# Altium PCB BLDC-2020.PcbDoc (part 3 of 3)
Units mil, origin at the board's own origin, x right, y up, seen from the top; angles counter-clockwise.
Board outline 3000 x 7500 mil, 4 copper layers (Top Layer, GND, Power, Bottom Layer), stack 26.468 mil thick; 202 components, 138 nets, 710 pads, 30 vias.
Unrouted connection lines stored in the file: 399.
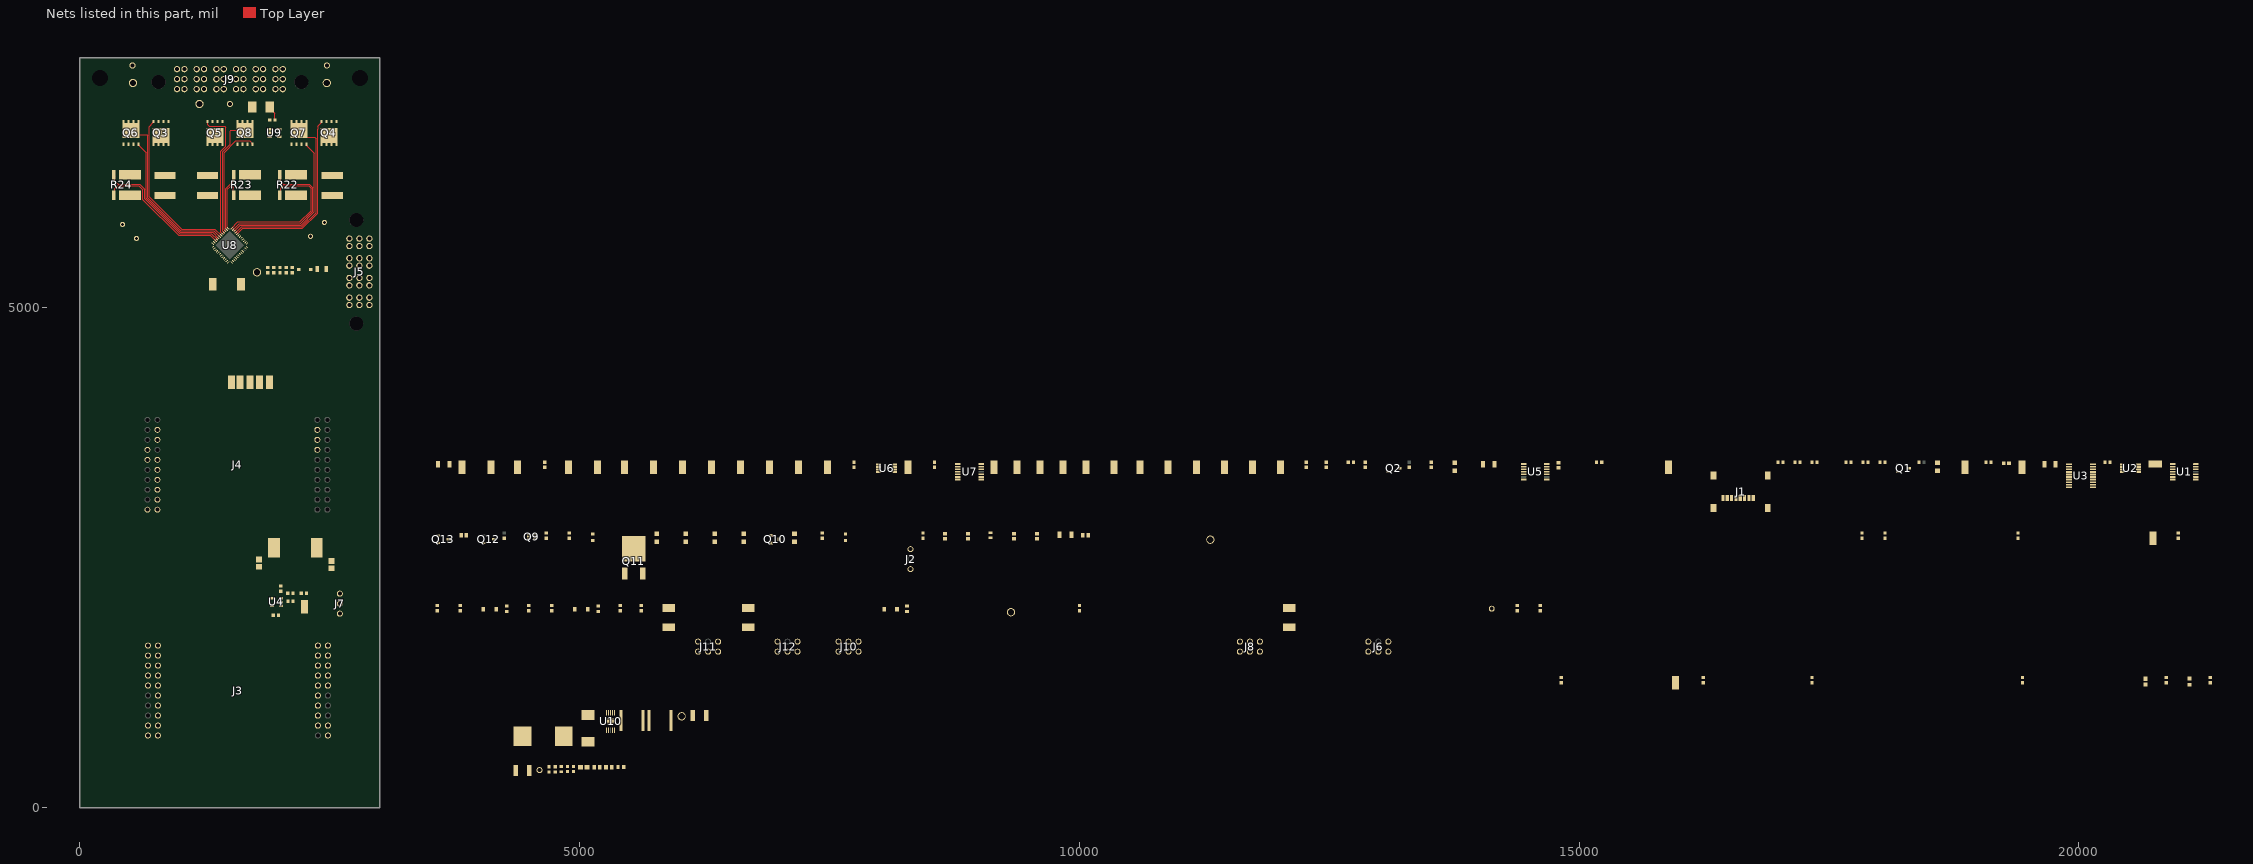
[diagram p3: the nets of this part, all layers, seen from the top]

## Part data (continued)
U2 U6: library part CMP-0859-00525-4, "TRIPLE SCHMITT-TRIGGER BUFFER, DCT0008A, LARGE T&R", F @ Nom Voltage(Max)(Mhz)=150, Generic Part Number=SN74LVC3G17, ICC @ Nom Voltage(Max)(mA)=0.01, Manufacturer="Texas Instruments", Operating Temperature Range(C)="-40 to 125,-40 to 85", Rating=Catalog, tpd @ Nom Voltage(Max)(ns)=9.2,6.2,5.4,4.1, Voltage(Nom)(V)=1.8,2.5,3.3,5, 3-State Output=No, Bits(#)=3, DatasheetVersion=SCES470E, Input Type=CMOS/TTL, Logic=True, Output Drive (IOL/IOH)(Max)(mA)=32/-32, Output Type=CMOS, PackageReference=DCT0008A, Schmitt Trigger=Yes, Sub-Family="Non-Inverting Buffer/Driver", Technology Family=LVC, VCC(Max)(V)=5.5, VCC(Min)(V)=1.65
U3: library part CMP-2000-04956-1, "Bidirectional Voltage-Level Translator for Open-Drain and Push-Pull Application, 8 bit, 1.2 to 3.6 V, -40 to 85 degC, 20-Pin TSSOP, Green (RoHS & no Sb/Br), Tape and Reel", Logic Case Style=TSSOP, Manufacturer="Texas Instruments", Operating Temperature Max=85degC, Operating Temperature Min=-40degC, Output Current=620µA, Supply Voltage Max=5.5V, Supply Voltage Min=1.2V, Datasheet URL=https://datasheet.ciiva.com/14287/txs0108e-14287280.pdf, Datasheet Version="Rev. B, 09/2008", Logic Type=VoltageLevelTranslator, Manufacturer URL=http://www.ti.com/, MSL=MSL1-Unlimited, No. of Inputs=8, No. of Pins=20, Packaging=CutTape, Propagation Delay=4.8ns, SVHC=NoSVHC(16-Jun-2014)
U4: library part CMP-0359-01946-2, "Single Channel, Low Noise, CMOS Operational Amplifier, RRO, 18 MHz Typical GBW, 10 V/us Typical SR, 2.8 to 6 V, 5-Pin SOT23 (S5-5), Commercial, Pb-Free, Mini Reel", Linear Technology Part Number=LTC6240, Manufacturer="Linear Technology", PartNumber=LTC6240CS5#TRMPBF, Channels (#)=1, Code_JEDEC=MO-193, ComponentLink1Description="Manufacturer URL", ComponentLink1URL=http://www.linear.com/, ComponentLink2Description=Datasheet, ComponentLink2URL=http://cds.linear.com/docs/en/datasheet/624012fe.pdf, ComponentLink3Description="Package Specification", ComponentLink3URL=http://cds.linear.com/docs/en/packaging/SOT_5_05-08-1635.pdf, DatasheetVersion="Rev. E", GBW (MHz) Typical=18, Is (mA) Typical=2, Mounting Technology="Surface Mount", PackageDescription="5-Lead Plastic TSOT-23, Body 1.63 x 2.90 mm, Pitch 0.95 mm", PackageReference=LT-S5-5-TSOT-23, Packing="Mini Reel", RevisionNote="URLs updated", RoHS=Pb-Free, SR (V/us) Typical=10, Type=VFB, Vos (mV) Typical=0.04, Vs Max (V)=6, Vs Min (V)=2.8
U5: library part CMP-2000-07335-1, "4-Bit Bidirectional Voltage-Level Translator with Automatic Direction Sensing and +/- 15-kV ESD Protection, -40 to 85 degC, 14-Pin TSSOP (PW), Green (RoHS & Sb/Br), Tape and Reel", Manufacturer="Texas Instruments", Operating Temperature=-40°C~85°C, Package / Case="14-TSSOP(0.173\",4.40mmWidth)", Package Description="14-Pin Thin Shrink Small Outline Package, Body 5 x 4.4 mm, Pitch 0.65 mm", Package Reference=PW14, Standard Package=1, Supplier Device Package=14-TSSOP, Voltage - Supply=1.2V~3.6V,1.65V~5.5V, Category=IntegratedCircuits(ICs), Data Rate=100Mbps, Datasheet URL=http://www.ti.com/general/docs/lit/getliterature.tsp?genericPartNumber=TXB0104&fileType=pdf, Datasheet Version="Rev. G, 11/2014", Differential - Input=Output:No/No, Dynamic Catalog=TXBSeries, Family=Logic-Translators, Input Type=Logic, Logic Function=Translator,Bidirectional, Manufacturer URL=http://www.ti.com/, Mounting Technology=SurfaceMount, Number of Bits=4, Number of Channels=4, Number of Outputs/Channel=1, Other Names=296-21929-6, Output Type=Logic, Packaging=Digi-Reel®, Product Training Modules=VoltageLevelTranslation, Propagation Delay (Max)=4ns, Series=-
U8: "IC 3PHASE GATE DRIVER 48VQFN", Manufacturer="Texas Instruments", Max Operating Temperature=125°C, Min Operating Temperature=-40°C, ClassName="3.3V Regulator", ComponentLink1Description=http://www.ti.com/lit/ds/symlink/drv8323r.pdf?src-supplier=Digi-Key, ComponentLink1URL=http://www.ti.com/lit/ds/symlink/drv8323r.pdf?src-supplier=Digi-Key, Manufacturer 2="Texas Instruments", Manufacturer Part Number=DRV8323RSRGZR, Manufacturer Part Number 2=DRV8323RSRGZR, Pricing 1="1=4.44, 10=3.991, 100=3.2698, 500=2.78356, 1000=2.34758 (USD)", Pricing 2="1=4.44000, 10=3.99100, 100=3.26980, 500=2.78356, 1000=2.34758 (USD)", RoHS=No, Stock 1=5951, Stock 2=7391, Supplier 1=Digi-Key, Supplier 2=Digi-Key
U9: library part CMP-0192-00172-1, "Thermal Sensor with SPI Interface, 5-Pin SOT-23, -55°C to +125°C Temperature, Tape and Reel", Code_IPC=SOT23-5, DatasheetVersion="revA, Aug-2002", PackageDescription="5-Lead Plastic Small Outline Transistor (CT) [SOT-23]", PackageReference=SOT-23-CT5, PackageVersion="revBB, Aug-2009"
U10: library part CMP-0323-00512-3, "Buck Inverting Buck-Boost Step Down Regulator with 3.5 to 60 V Input and 0.8 to 58 V Output, -40 to 150 degC, 10-Pin MSOP-PowerPAD (DGQ), Green (RoHS & no Sb/Br)", Manufacturer="Texas Instruments", Rating=Catalog, Switch Current Limit(Typ)(A)=3.5, ClassName="5V Regulator", Code_JEDEC=MO-187-BA-T, ComponentLink1Description=Datasheet, ComponentLink1URL=http://www.ti.com/general/docs/lit/getliterature.tsp?genericPartNumber=TPS54260&fileType=pdf, ComponentLink2Description="Package Specification", ComponentLink2URL=http://www.ti.com/lit/ml/mpds043e/mpds043e.pdf, ComponentLink3Description="URL Link1", ComponentLink3URL="Samples URL:http://www.ti.com/product/tps54260#samples", DatasheetVersion=SLVSA86A, Duty Cycle(Max)(%)=98, Eco-Plan="Green (RoHS & no Sb/Br)", Iout(Max)(A)=2.5, Iq(Typ)(mA)=0.138, Mounting Technology="Surface Mount", PackageDescription="10-Pin PowerPAD Plastic Small Outline 0.5 mm Pitch, Exposed Pad", PackageReference=DGQ0010D, PackageVersion="revF, Nov-2011", PartNumber=TPS54260DGQR, Regulated Outputs(#)=1, SubFamily="Step-Down Regulator", Topology="Buck, Inverting Buck-Boost", Vin(Max)(V)=60, Vin(Min)(V)=3.5, Vout(Max)(V)=58, Vout(Min)(V)=0.8

## Free pads (board coordinates)
  round 150 hole 160: 5(200,7300) 5(2800,7300)

## Via types
v1: diameter 19.68, hole 7.87, Top Layer to Bottom Layer, 30 vias

## Nets (pads, with @x,y where several pads share a name; then routed paths per layer and width w, separated by ;. In a path a pad name is that pad's centre, name@x,y a point inside that pad or via, vN(x,y) a via of type N, cw(c..) or ccw(c..) an arc to the next point about the centre after c; other vN are vias at no path point)
3.3V: C1.2 C3.2 C5.1 C6.2 C10.2 C12.2 C22.2 C26.2 C36.2 J1.4 J3.1 L2.2 L3.1 Q9.3 Q13.G R5.2 R6.2 R7.2 R19.2 R20.2 R21.2 R30.2 R35.1 R47.2 R48.2 TP46.1 U1.13 U1.14 U3.2 U4.5 U5.1 U7.13 U7.14 U9.5
5V: C2.2 C4.2 C9.2 C11.2 C27.2 C28.2 F1.2 F2.2 F3.2 F4.2 J6.1 J10.1 L1.2 R2.2 R10.2 R14.2 R15.2 R16.2 R27.2 R29.2 R36.2 R37.2 R39.2 R40.2 TP45.1 U2.8 U3.19 U5.14 U6.8
+3.3V: C21.2 U8.26
AGND: C3.1 C4.1 C5.2 C7.1 C9.1 C10.1 C15.1 C16.1 C17.1 C18.1 C19.1 C20.1 C21.1 C22.1 C25.1 C26.1 C27.1 C28.1 C29.1 C30.1 C31.1 C32.1 C33.1 C34.2 C35.2 C36.1 C37.1 C38.1 C39.1 C40.1 D2.2 D3.1 D4.2 D5.2 D6.2 J5.P3-1 J5.P3-2 J5.P3-3 J5.P3-4 J5.P3-5 J5.P3-6 J5.P4-1 J5.P4-2 J5.P4-3 J5.P4-4 J5.P4-5 J5.P4-6 J6.3 J7.3 J8.3 J10.3 J11.3 J12.3 LED6.1 LED7.1 Q1.S Q2.S Q9.1 Q10.3 Q11.3 Q12.S Q13.S R1.1 R4.1 R12.1 R18.1 R22.3 R23.3 R24.3 R25.2 R26.1 R31.1 R32.1 R34.1 R42.1 R46.2 R49.1 R51.1 R53.1 R55.1 TP42.1 TP43.1 TP44.1 TP47.1 TP48.1 TP50.1 U3.11 U4.2 U5.5 U5.7 U5.10 U8.2 U8.27 U8.35 U8.43 U9.2 U10.9 U10.11
  other v1: 5284.57,844.11 5331.82,844.11 5308.2,861.83 5284.57,879.54 5331.82,879.54
CAL: J3.2 R26.2 R43.1 U8.34
Chan_A: J4.39 TP2.1 U1.6
Chan_A_Raw: J10.5 U2.3
Chan_B: J4.38 TP3.1 U1.8
Chan_B_Raw: J10.6 U2.6
CS_DRV: J3.8 R19.1 U8.32
CS_SD: J1.2 J3.11 R5.1 R44.2
CS_TEMP: J3.32 R20.1 U9.1
Enable: R18.2 R45.1 TP31.1 U8.33
EXT_SPI_CLK: J8.4 U5.13
EXT_SPI_MISO: J8.6 U5.11
EXT_SPI_MOSI: J8.5 U5.12
"Fan Enable": J3.31 Q11.1 R42.2
GHA: Q4.G TP32.1 U8.8 | length 1822.9
  Top Layer w10: U8.8@1573.08,5739.84 1628.24,5795 2225.51,5795 2378.34,5947.83 2378.34,6787.07 2378.34,6816 2405.84,6843.49 2415,6852.66 Q4.G@2415,6864.17
GHB: Q5.G TP33.1 U8.17 | length 1319.5
  Top Layer w10: Q5.G@1275,6864.17 1277.56,6861.62 1277.56,6832.44 1295,6815 1450,6815 1460,6805 1460,6615.25 1410,6565.25 1410,5756.76 U8.17@1426.92,5739.84
GHC: Q3.G TP34.1 U8.18 | length 1649.3
  Top Layer w10: Q3.G@735,6864.17 735,6855 694,6814 694,6109.88 1015.88,5788 1350.92,5788 U8.18@1413,5725.92
GLA: Q7.G TP38.1 U8.10 | length 1589.1
  Top Layer w10: U8.10@1545.24,5767.67 1604.56,5827 2212.25,5827 2345.69,5960.43 2345.69,6548.25 2265,6628.94 Q7.G@2265,6635.83
GLB: Q8.G TP39.1 U8.15 | length 1139
  Top Layer w10: U8.15@1454.76,5767.67 1455,5767.91 1443,5779.91 1443,6553 1560,6670 1697.72,6670 1725,6642.72 Q8.G@1725,6635.83
GLC: Q6.G TP40.1 U8.20 | length 1459.3
  Top Layer w10: Q6.G@585,6635.83 585,6630 662,6553 662,6096.63 1002.63,5756 1327.24,5756 U8.20@1385.16,5698.08
GND: C1.1 C2.1 C6.1 C11.1 C12.1 J1.6 J1.Shield J3.20 J3.22 J4.20 R17.1 U1.7 U1.12 U2.4 U6.4 U7.7 U7.12
"Hall A": J3.19 TP18.1 U7.3
"Hall B": J3.13 TP19.1 U7.6
"Hall C": J3.12 TP29.1 U7.8
Hall_A_Raw: J6.4 R14.1 U6.1
Hall_B_Raw: J6.5 R15.1 U6.3
Hall_C_Raw: J6.6 R16.1 U6.6
"Hi A": J3.40 TP9.1 U8.37
"Hi B": J3.38 TP11.1 U8.39
"Hi C": J3.36 TP13.1 U8.41
Index: J4.40 TP1.1 U1.3
Index_Raw: J10.4 U2.1
IO_1: J11.4 U3.20
IO_1_RAW: J3.26 U3.1
IO_2: J11.5 U3.18
IO_2_RAW: J3.27 U3.3
IO_3: J11.6 U3.17
IO_3_RAW: J3.28 U3.4
IO_4: J12.4 U3.16
IO_4_RAW: J3.29 U3.5
IO_5: J12.5 U3.15
IO_5_RAW: J3.30 U3.6
IO_6: J12.6 U3.14
IO_6_RAW: J4.37 U3.7
IO_7: J10.2 U3.13
IO_7_RAW: J4.36 U3.8
IO_8: J8.2 U3.12
IO_8_RAW: J4.35 U3.9
"Low A": J3.39 TP10.1 U8.38
"Low B": J3.37 TP12.1 U8.40
"Low C": J3.35 TP14.1 U8.42
NetC7_2: C7.2 R9.2 U4.3
NetC8_1: C8.1 R8.2 R9.1
NetC13_2: C13.2 U8.5
NetC14_1: C14.1 U8.3
NetC14_2: C14.2 U8.4
NetC20_2: C20.2 U8.36
NetC23_1: C23.1 D2.1 L2.1 U8.45
NetC23_2: C23.2 U8.44
NetC24_1: C24.1 U10.1
NetC24_2: C24.2 D3.2 L1.1 U10.10
NetC31_2: C31.2 U10.4
NetC32_2: C32.2 R33.2
NetC33_2: C33.2 R33.1 U10.8
NetC37_2: C37.2 J7.1 L3.2
NetD1_2: D1.2 R25.1 | length 151.4
  Top Layer w10: D1.2@1899.02,7010 1899.02,6998.5 1950,6947.52 1950,6880.59 R25.1@1950.59,6880
NetF1_1: F1.1 J2.1
NetF2_1: F2.1 J8.1
NetF3_1: F3.1 J11.1
NetF4_1: F4.1 J12.1
NetJ1_1: J1.1 R7.1
NetJ1_8: J1.8 R6.1
NetJ2_3: J2.3 Q11.4
NetLED1_1: LED1.1 Q1.D
NetLED1_2: LED1.2 R2.1
NetLED2_1: LED2.1 Q2.D
NetLED2_2: LED2.2 R10.1
NetLED3_1: LED3.1 Q10.2
NetLED3_2: LED3.2 R35.2
NetLED4_1: LED4.1 Q9.6
NetLED4_2: LED4.2 R40.1
NetLED5_1: LED5.1 Q13.D
NetLED5_2: LED5.2 R36.1
NetLED6_2: LED6.2 R37.1
NetLED7_2: LED7.2 R38.1
NetLED8_1: LED8.1 Q12.D
NetLED8_2: LED8.2 R39.1
NetLED9_1: LED9.1 R46.1
NetLED9_2: LED9.2 Q9.4
NetQ6_S: Q6.S R24.1
NetQ7_S: Q7.S R22.1
NetQ8_S: Q8.S R23.1
NetQ9_2: Q9.2 R43.2
NetQ9_5: Q9.5 R41.2
NetQ10_1: Q10.1 R44.1
NetR1_2: R1.2 U1.1 U1.4 U1.10
NetR3_1: R3.1 R4.2 U3.10
NetR12_2: R12.2 R13.1 U5.8
NetR17_2: R17.2 U7.1 U7.4 U7.10
NetR27_1: R27.1 R32.2 U10.7
NetR28_2: R28.2 U8.48
NetR29_1: R29.1 U10.6
NetR30_1: R30.1 R34.2 U8.1
NetR31_2: R31.2 U10.5
NetU1_2: U1.2 U2.7
NetU1_5: U1.5 U2.5
NetU1_9: U1.9 U2.2
NetU6_2: U6.2 U7.9
NetU6_5: U6.5 U7.5
NetU6_7: U6.7 U7.2
nFault: J3.33 J4.33 R21.1 R41.1 TP30.1 TP41.1 U8.28
PHASE_A: J9.1 J9.2 J9.3 J9.4 J9.5 J9.6 J9.7 J9.8 J9.9 J9.10 J9.11 J9.12 Q4.S Q7.D R50.2 TP35.1 U8.9 | length 1830.7
  Top Layer w10: U8.9@1559.16,5753.75 1616.4,5811 2218.88,5811 2361.69,5953.8 2361.69,6693.31 2348.23,6706.77 2258.82,6706.77 Q7.D@2190,6775.59
PHASE_B: D1.1 J9.13 J9.14 J9.15 J9.16 J9.17 J9.18 J9.19 J9.20 J9.21 J9.22 J9.23 J9.24 Q5.S Q8.D R52.2 TP36.1 U8.16 | length 1201.1
  Top Layer w10: U8.16@1440.84,5753.75 1427,5767.6 1427,6559.63 1505,6637.63 1505,6769.14 1510.86,6775 1649.41,6775 Q8.D@1650,6775.59
PHASE_C: J9.25 J9.26 J9.27 J9.28 J9.29 J9.30 J9.31 J9.32 J9.33 J9.34 J9.35 J9.36 Q3.S Q6.D R54.2 TP37.1 U8.19 | length 1692.7
  Top Layer w10: Q6.D@510,6775.59 555.59,6730 671,6730 678,6723 678,6103.25 1009.25,5772 1339.08,5772 U8.19@1399.08,5712
SA_N: R22.4 U8.12 | length 1520.2
  Top Layer w10: U8.12@1517.4,5795.51 1580.89,5859 2199,5859 2313.69,5973.69 2313.69,6195 2286.69,6222 2035,6222 2009.72,6196.72 2009.72,6140.94 R22.4@1997.2,6128.43 R22.4@1997.2,6158.15
SA_P: R22.2 U8.11 | length 1558.5
  Top Layer w10: U8.11@1531.32,5781.59 1592.73,5843 2205.63,5843 2329.69,5967.06 2329.69,6201.63 2293.31,6238 2035,6238 2009.72,6263.28 2009.72,6319.06 R22.2@1997.2,6331.57 R22.2@1997.2,6301.85
SB_N: R23.4 U8.13 | length 547.6
  Top Layer w10: U8.13@1482.6,5795.51 1475,5803.11 1475,6185 1506.14,6216.14 1523.86,6216.14 1535,6205 1535,6130.63 R23.4@1537.2,6128.43
SB_P: R23.2 U8.14 | length 586.4
  Top Layer w10: U8.14@1468.68,5781.59 1459,5791.28 1459,6191.63 1535,6267.63 1535,6329.37 R23.2@1537.2,6331.57
SC_N: R24.4 U8.22 | length 1372.1
  Top Layer w10: R24.4@337.2,6128.43 349.72,6140.94 349.72,6191.72 378,6220 590,6220 630,6180 630,6083.37 989.37,5724 1303.56,5724 U8.22@1357.33,5670.24
SC_P: R24.2 U8.21 | length 1388.6
  Top Layer w10: R24.2@337.2,6331.57 349.72,6319.06 349.72,6268.28 382,6236 596.63,6236 646,6186.63 646,6090 996,5740 1315.4,5740 U8.21@1371.25,5684.16
SOA: J3.23 TP8.1 U8.25
SOB: J3.24 TP7.1 U8.24
SOC: J3.25 TP6.1 U8.23
SPI_1_CLK: J1.5 J3.34 J4.32 TP20.1 TP26.1
SPI_1_MISO: J1.7 J3.9 J4.14 R47.1 TP21.1 TP28.1
SPI_1_MOSI: J1.3 J3.10 J4.15 TP22.1 TP27.1
SPI_CLK: J3.7 TP15.1 U5.2 U8.31 U9.3
SPI_MISO: J3.14 R48.1 TP17.1 U5.4 U8.29 U9.4
SPI_MOSI: J3.15 TP16.1 U5.3 U8.30
Throttle: C8.2 J3.6 R11.2 TP5.1 U4.1 U4.4
"Throttle Raw": J7.2 R8.1 R11.1 TP4.1
VBATT: C13.1 C15.2 C16.2 C17.2 C18.2 C19.2 C25.2 C29.2 C30.2 C34.1 C35.1 J5.P1-1 J5.P1-2 J5.P1-3 J5.P1-4 J5.P1-5 J5.P1-6 J5.P2-1 J5.P2-2 J5.P2-3 J5.P2-4 J5.P2-5 J5.P2-6 Q3.D Q4.D Q5.D R28.1 R38.2 R49.2 TP49.1 U8.6 U8.7 U8.47 U10.2
Voltage_A: C38.2 D4.1 J4.27 R50.1 R51.2 TP25.1
Voltage_B: C39.2 D5.1 J4.28 R52.1 R53.2 TP24.1
Voltage_C: C40.2 D6.1 J4.29 R54.1 R55.2 TP23.1
pads on no net: J2.2 J3.3 J3.4 J3.5 J3.16 J3.17 J3.18 J3.21 J4.1 J4.2 J4.3 J4.4 J4.5 J4.6 J4.7 J4.8 J4.9 J4.10 J4.11 J4.12 J4.13 J4.16 J4.17 J4.18 J4.19 J4.21 J4.22 J4.23 J4.24 J4.25 J4.26 J4.30 J4.31 J4.34 J5.None J6.2 J9.None J11.2 J12.2 Q1.G Q2.G Q12.G R3.2 R13.2 R45.2 U1.11 U5.6 U5.9 U7.11 U8.46 U8.49 U10.3
copper on no net:
  other v1: 1500,5502.51 1469.38,5533.13 1530.62,5533.13 1438.75,5563.75 1500,5563.75 1561.25,5563.75 1408.13,5594.38 1469.38,5594.38 1530.62,5594.38 1591.87,5594.38 1377.51,5625 1438.75,5625 1500,5625 1561.25,5625 1622.49,5625 1408.13,5655.62 1469.38,5655.62 1530.62,5655.62 1591.87,5655.62 1438.75,5686.25 1500,5686.25 1561.25,5686.25 1469.38,5716.87 1530.62,5716.87 1500,5747.49

## Polygon pours and split planes (outlines as drawn)
VBATT on Top Layer "Top Layer-VBATT" (solid, pour order 24): 2390,6815 2410,6835 2660,6835 2685,6810 2685,6245 2660,6220 2425,6220 2390,6255
PHASE_A on Top Layer "Top Layer-PHASE_A" (solid, pour order 4): 2100,6685 2365,6685 2390,6710 2390,6815 2420,6845 2585,6845 2605,6865 2605,7445 2560,7490 1720,7490 1700,7470 1700,7130 1715,7115 1760,7115 1800,7075 1995,7075 2025,7045 2025,6760
NetQ6_S on Top Layer "Top Layer-NetQ6_S" (solid, pour order 22): 565,6614.17 565,6660 555,6670 498,6670 355,6670 295,6610 295,6450 365,6380 365,6270 390,6245 640,6245 650,6255 650,6550 590,6610 570,6610
AGND on Top Layer "Top Layer-AGND" (solid, pour order 20): 1375,6205 1395,6185 1395,5820 1375,5800 1025,5800 705,6120 705,6190 720,6205
VBATT on Top Layer "Top Layer-VBATT 1" (solid, pour order 18): 705,6230 720,6215 1385,6215 1400,6230 1400,6580 1450,6630 1450,6795 1440,6805 725,6805 705,6785
PHASE_B on Top Layer "Top Layer-PHASE_B" (solid, pour order 8): 1215,6815 1450,6815 1575,6690 1810,6690 1840,6720 1840,7030 1744.8,7125.2 1719.22,7125.2 1690,7154.42 1690,7475 1675,7490 1325,7490 1310,7475 1310,7180 1245,7115 1215,7115 1190,7090 1190,6840
PHASE_C on Top Layer "Top Layer-PHASE_C" (solid, pour order 0): 650,6690 690,6730 690,6800 720,6830 1105,6830 1180,6905 1180,7080 1215,7115 1230,7115 1310,7195 1310,7475 1295,7490 440,7490 395,7445 395,6725 430,6690
NetQ7_S on Top Layer "Top Layer-NetQ7_S" (solid, pour order 16): 2025,6385 2025,6270 2045,6250 2325,6250 2335,6260 2335,6545 2270,6610 2245,6610 2240,6615 2240,6665 2230,6675 1950,6675 1915,6640 1915,6420 1935,6400 2010,6400
NetQ8_S on Top Layer "Top Layer-NetQ8_S" (solid, pour order 12): 1950,6245 1960,6255 1960,6380 1945,6395 1925,6395 1905,6415 1905,6585 1885,6605 1700,6605 1695,6610 1695,6655 1690,6660 1565,6660 1455,6550 1455,6405 1470,6390 1560,6390 1565,6385 1565,6270 1590,6245
AGND on Top Layer "Top Layer-AGND 1" (solid, pour order 10): 1565,6075 1565,6210 1585,6230 1915,6230 1965,6180 1965,6070 1975,6060 2040,6060 2050,6070 2050,6185 2070,6205 2275,6205 2295,6185 2295,5980 2190,5875 1520,5875 1490,5905 1490,6055 1505,6070 1560,6070
VBATT on Power "Power-VBATT" (solid, pour order 26): 2760,6620 3000,6380 3000,4725 2975,4700 2430,4700 2225,4905 2225,5250 1810,5665 0,5665 0,6480 140,6620

## Keep-outs
Top Layer:
  region: 150,7350
Keep-Out Layer:
  circle w10: c2800,7300 r187.5
  circle w10: c200,7300 r187.5

## Silkscreen, mask and mechanical layers (free items; w line width, h text height)
Mechanical 1:
  the board outline again, w0

## Text inside footprints (layer, text, board x,y; h text height)
J2: Mechanical 1 "J1" at 8098,2467.43 h30 r90
J3: Mechanical 1 "J1" at 2424.21,1177.57 h30 r270; Mechanical 1 "J1" at 724.21,1177.57 h30 r270
J4: Mechanical 1 "J1" at 2419.21,3437.57 h30 r270; Mechanical 1 "J1" at 719.21,3437.57 h30 r270
J5: Top Overlay "1" at 2632.12,5016.53 h73.82 r90
J6: Mechanical 1 "J1" at 12972.43,1872 h30
J7: Mechanical 1 "J1" at 2812,2057.57 h30 r270
J8: Mechanical 1 "J1" at 11687.43,1872 h30
J9: Top Overlay "1" at 2040.33,7125.47 h73.82 r180
J10: Mechanical 1 "J1" at 7672.43,1872 h30
J11: Mechanical 1 "J1" at 6267.43,1872 h30
J12: Mechanical 1 "J1" at 7062.43,1872 h30